# EAGLE board 7805 (EAGLE 6.6.0)
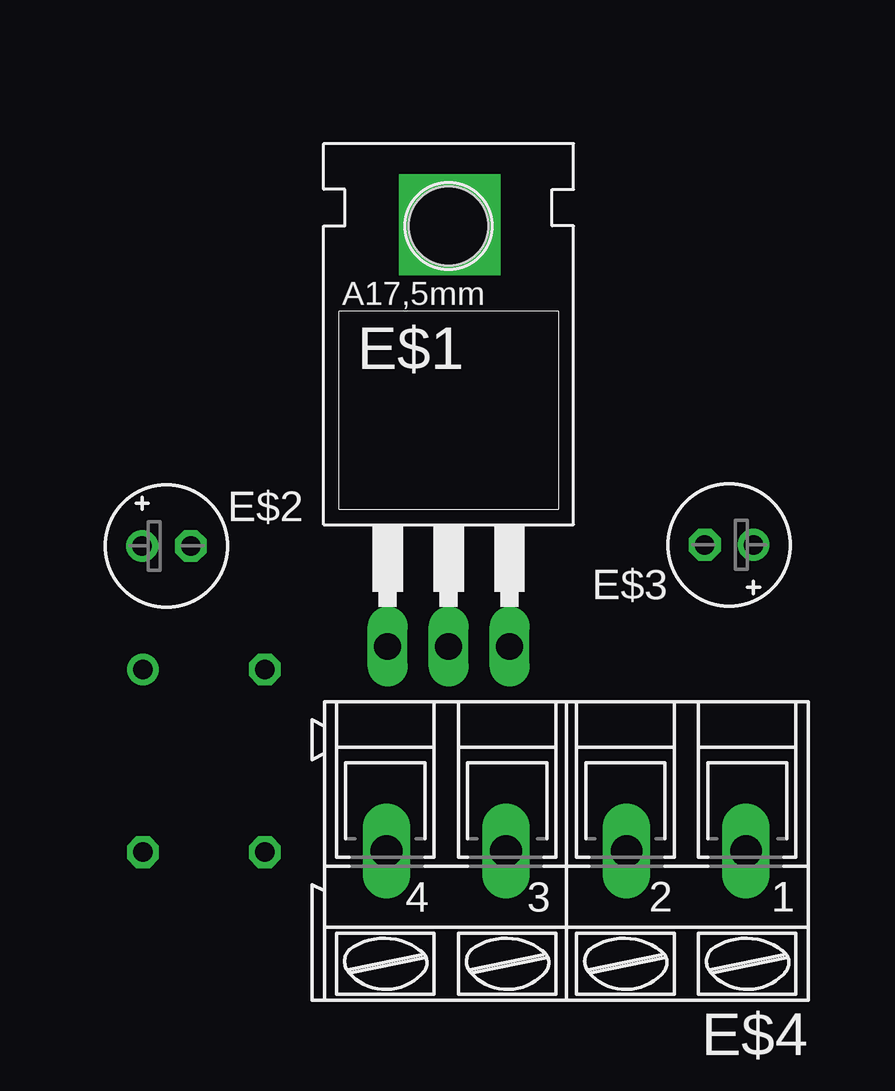
[diagram p0: board, top side]
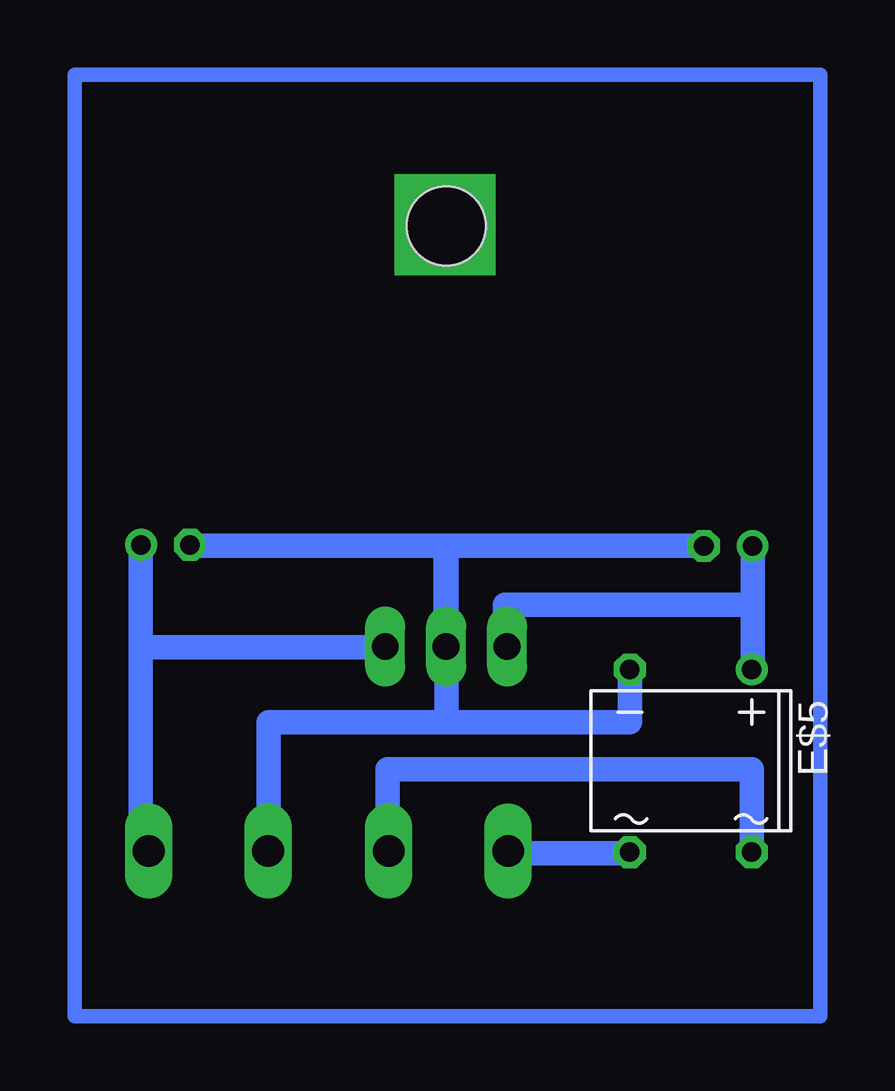
[diagram p1: board, bottom side, seen from below]

No outline drawn. Coordinates in mm, seen from the top.
Copper layers (1*16): Top 0.035mm / dielectric 1.5mm / Bottom 0.035mm
Design rules "default": minimum track width 10mil, minimum drill 24mil, track to track 8mil, track to pad 8mil, pad to pad 8mil, via to via 8mil, smd to smd 8mil, copper to edge 40mil, drill to drill 8mil, minimum pad ring 10mil, minimum via ring 8mil, stop-mask expansion 4mil, vias tented up to drill 0mil, thermal gap 10mil

## Footprints (pad centres in the part's own frame; a part is rotated, then mirrored left to right if it is on the bottom)
TO220 = drill 1.118 long: 1 -2.54,-6.35; 2 0,-6.35; 3 2.54,-6.35 | hole 3.302: 0,11.176
E2-5 = drill 0.813 pad 1.27: + -1.016,0 | drill 0.813 pad 1.27 octagon: - 1.016,0
AK300/4 = drill 1.321 long: 1 -7.493,0; 2 -2.515,0; 3 2.515,0; 4 7.493,0
DB = drill 0.813: + -2.54,-3.81 | drill 0.813 octagon: - 2.54,-3.81; AC1 2.54,3.81; AC2 -2.54,3.81

## Placement (x,y rotation side)
E$1  [TO220]  15.59,21.75 0 top
E$2  [E2-5]  3.83,19.59 0 top
E$3  [E2-5]  27.29,19.64 180 top
E$4  [AK300/4]  20.5,6.88 180 top
E$5  [DB]  5.39,10.64 180 bottom

## Library data of the parts
E$1 = ref-packages
E$2 E$3 = rcl
E$4 = con-ptr500
E$5 = rectifier

## Tracks (layer width: path | path; a pad name or v marks a point on that pad's centre or on a via)
S$1
  Bottom 1.016: 13.04,6.78 7.81,6.78
S$2
  Bottom 1.016: 2.85,6.78 2.85,10.29 18.03,10.29 18.03,6.81
S$3
  Bottom 1.016: 7.93,14.42 7.93,12.24 15.58,12.24 | 4.84,19.59 15.58,19.59 15.58,12.24 | 23,6.89 23,12.24 15.58,12.24
S$4
  Bottom 1.016: 2.89,19.59 2.81,19.59 2.81,17.14 | 2.81,17.14 2.81,14.46 | 13.13,15.23 13.13,17.14 2.81,17.14
S$5
  Bottom 1.016: 15.62,15.42 15.62,19.59 26.32,19.59
S$6
  Bottom 1.016: 18.18,15.38 28.32,15.38 | 28.32,15.38 28.32,19.63 | 28.32,15.38 28.32,6.81
S$7  (via drill 3.2)
  other vias: 15.64,32.97
S$8
  Bottom 0.61: 0,0 0,39.23 31.08,39.23 31.08,0 0,0